# Altium PCB 24.067.PcbDoc
Units mil, origin at the board's own origin, x right, y up, seen from the top; angles counter-clockwise.
Board outline 1929.13 x 1023.62 mil, 2 copper layers (Top Layer, Bottom Layer); 19 components, 32 nets, 65 pads, 0 vias.
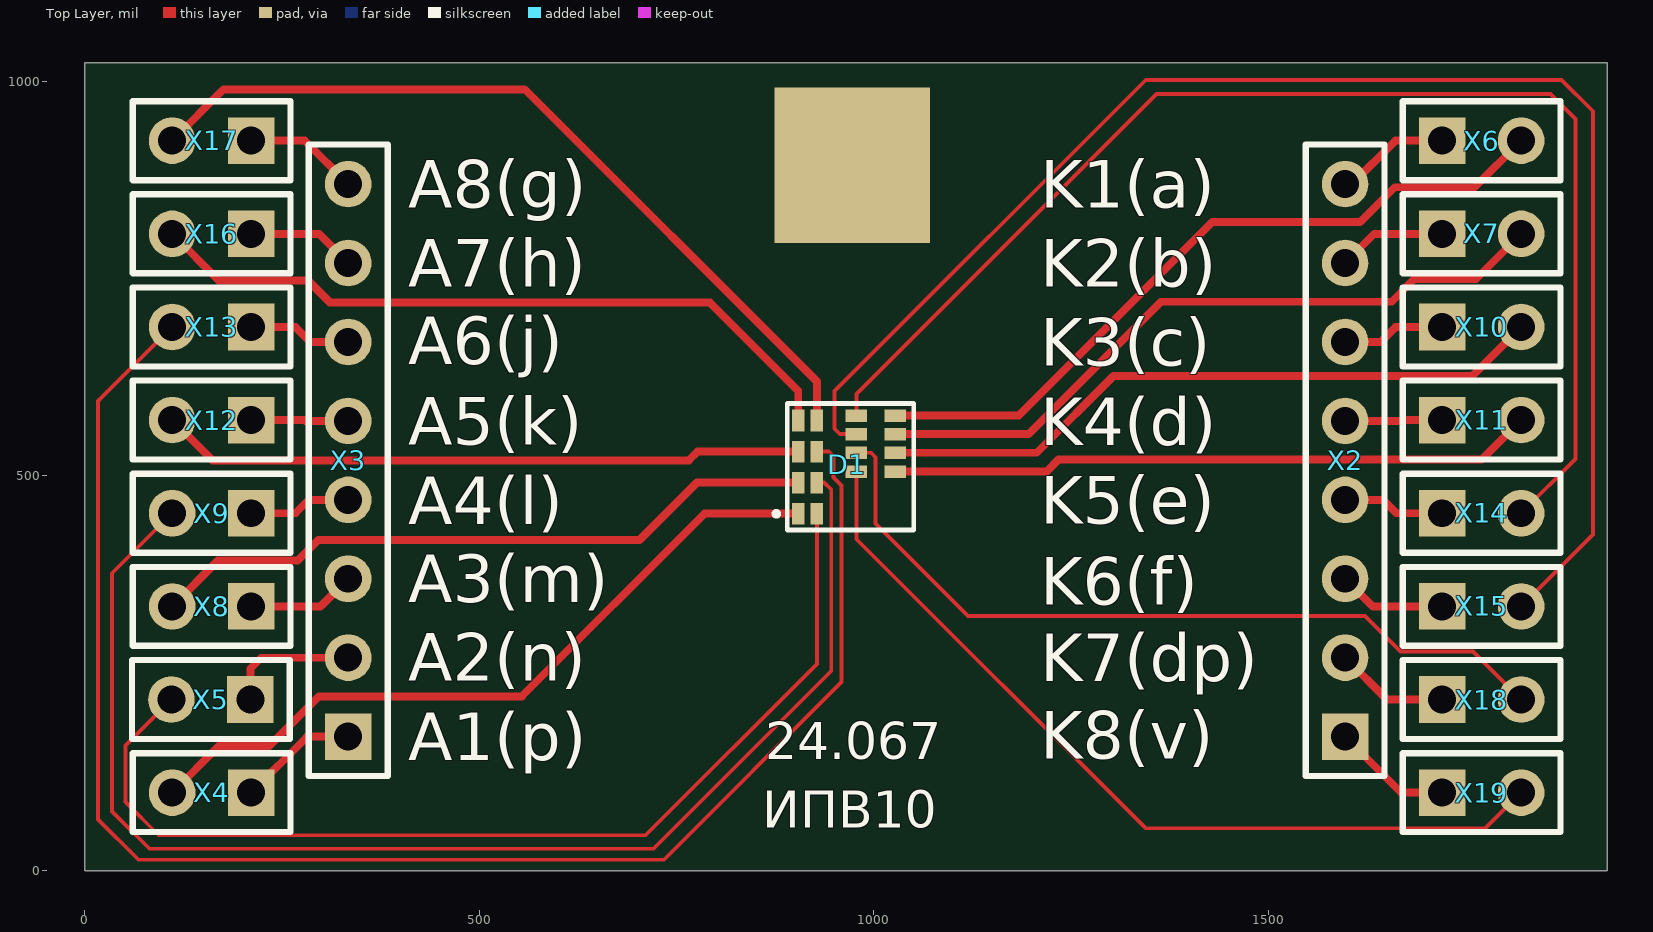
[diagram p0: Top Layer view]
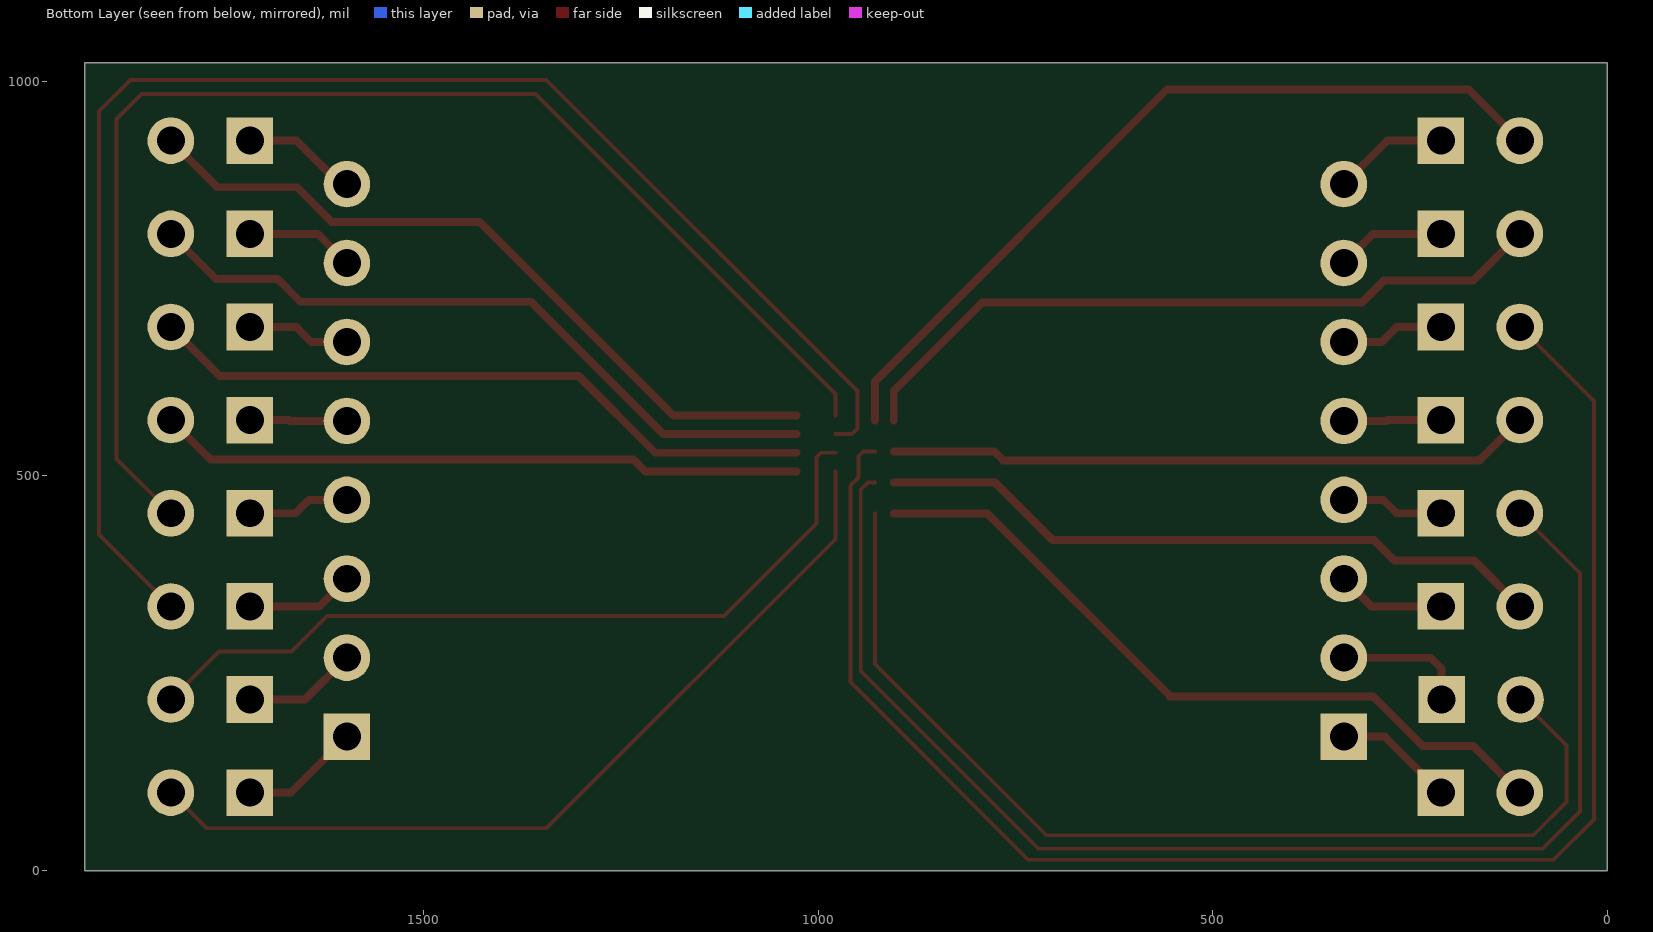
[diagram p1: Bottom Layer view, seen from below]

## Layer stack, top to bottom
Top Solder: solder mask 0.4, Solder Resist, Dk 3.5
Top Layer: signal copper 1.4
Dielectric 1: dielectric 12.6, FR-4, Dk 4.8
Bottom Layer: signal copper 1.4
Bottom Solder: solder mask 0.4, Solder Resist, Dk 3.5

## Board outline
1929.13,0 1929.13,1023.62 0,1023.62 0,0

## Design rules (kind name [scope] priority, off if disabled: settings)
Clearance [All] p1: gap=10 ignorepadtopadclearanceinfootprint=FALSE except(0: Arc-Hole Track-Hole SMDPad-Hole THPad-Hole Via-Hole Fill-Hole Poly-Hole Region-Hole Text-Hole; 7.87: Arc-Arc Arc-Track Arc-SMDPad Arc-THPad Track-Track Track-SMDPad Track-THPad SMDPad-SMDPad SMDPad-THPad THPad-THPad)
PolygonConnect [All] p1: connectstyle=Relief reliefconductorwidth=10 reliefentries=4 polygonreliefangle="90 Angle" airgapwidth=10
RoutingVias [All] p1: holewidth=28 width=50 viastyle="Through Hole" minholewidth=28 minwidth=50 maxholewidth=28 maxwidth=50
SolderMaskExpansion [All] p1: expansion=4
Width [All] p1: maxlimit=10 minlimit=4.92 preferedwidth=10
30 further rules are at their usual default settings.

## Components (designator, comment, footprint, x,y, rotation, side; value= is the part's Value field where it differs from the comment)
D1 "LED_8x8" LED_8x8 903.81,452 r0 top
X2 "Header 8" HDR1X8 1596.91,169.74 r90 top
X3 "Header 8" HDR1X8 333.91,169.74 r90 top
X4 "Header 2" HDR1X2 210.91,98.74 r180 top
X5 "Header 2" HDR1X2 209.91,216.74 r180 top
X6 "Header 2" HDR1X2 1719.91,924.74 r0 top
X7 "Header 2" HDR1X2 1719.91,806.74 r0 top
X8 "Header 2" HDR1X2 210.91,334.74 r180 top
X9 "Header 2" HDR1X2 210.91,452.74 r180 top
X10 "Header 2" HDR1X2 1719.91,688.74 r0 top
X11 "Header 2" HDR1X2 1719.91,570.74 r0 top
X12 "Header 2" HDR1X2 210.91,570.74 r180 top
X13 "Header 2" HDR1X2 210.91,688.74 r180 top
X14 "Header 2" HDR1X2 1719.91,452.74 r0 top
X15 "Header 2" HDR1X2 1719.91,334.74 r0 top
X16 "Header 2" HDR1X2 210.91,806.74 r180 top
X17 "Header 2" HDR1X2 210.91,924.74 r180 top
X18 "Header 2" HDR1X2 1719.91,216.74 r0 top
X19 "Header 2" HDR1X2 1719.91,98.74 r0 top

## Footprints (in the part's own frame and the unit in brackets; to place one, negate y for a bottom-side part, rotate by r counter-clockwise, add the part's x,y. Pads: shape width x height; smd on the part's side, far side on the other; paste and mask are expansions set on the pad)
HDR1X2 [mm] "Connector; Header; 2 Position"
  rect 1.5x1.5 hole 0.9: 1(0,0)
  round 1.5 hole 0.9: 2(2.54,0)
  silkscreen extent -1.27,-1.27 3.81,1.27
HDR1X8 [mm] "Connector; Header; 8 Position"
  rect 1.5x1.5 hole 0.9: 1(0,0)
  round 1.5 hole 0.9: 2(2.54,0) 3(5.08,0) 4(7.62,0) 5(10.16,0) 6(12.7,0) 7(15.24,0) 8(17.78,0)
  silkscreen extent -1.27,-1.27 19.05,1.27
LED_8x8 [mm] "24.067"
  rect 0.4x0.7 smd: 1(0,0) 2(0.6,0) 3(0,1) 4(0.6,1) 5(0,2) 6(0.6,2) 7(0,3) 8(0.6,3)
  rect 0.7x0.4 smd: 9(3.125,3.159) 10(3.125,2.559) 11(3.125,1.959) 12(3.125,1.359) 13(1.875,3.159) 14(1.875,2.559) 15(1.875,1.959) 16(1.875,1.359)
  silkscreen extent -0.72,-0.52 3.72,3.55

## Part data
X2 X3: "Header, 8-Pin", LatestRevisionDate=17-Jul-2002, LatestRevisionNote="Re-released for DXP Platform.", Publisher="Altium Limited"
X4 X5 X6 X7 X8 X9 X10 X11 X12 X13 X14 X15 X16 X17 X18 X19: "Header, 2-Pin", LatestRevisionDate=17-Jul-2002, LatestRevisionNote="Re-released for DXP Platform.", Publisher="Altium Limited"

## Free pads (board coordinates)
  rect 196.85x196.85 smd: 0(972.44,893.7)

## Nets (pads, with @x,y where several pads share a name; then routed paths per layer and width w, separated by ;. In a path a pad name is that pad's centre, name@x,y a point inside that pad or via, vN(x,y) a via of type N, cw(c..) or ccw(c..) an arc to the next point about the centre after c; other vN are vias at no path point)
A1: D1.1 X4.2 | length 939.6
  Top Layer w10: X4.2 169.91,157.74 233.91,157.74 296.91,220.74 553.91,220.74 785.41,452.24 D1.1@904.09,452.24
A1_0: X3.1 X4.1 | length 152.4
  Top Layer w10: X4.1 281.91,169.74 X3.1
A2: D1.2 X5.2 | length 1328.2
  Top Layer w4.92: X5.2 51.91,158.74 51.91,86.74 93.91,44.74 710.72,44.74 927.91,261.93 D1.2@927.91,452.74
A2_0: X3.2 X5.1 | length 168.8
  Top Layer w10: X5.1 209.91,255.74 223.91,269.74 X3.2
A3: D1.3 X8.2 | length 858.2
  Top Layer w10: X8.2 168.91,392.74 269.91,392.74 295.91,418.74 702.91,418.74 775.78,491.61 D1.3@904.09,491.61
A3_0: X3.3 X8.1 | length 137.5
  Top Layer w10: X8.1 298.91,334.74 X3.3
A4: D1.4 X9.2 | length 1684.8
  Top Layer w4.92: X9.2 34.91,376.74 34.91,74.85 82.02,27.74 720.91,27.74 945.92,252.75 945.92,482.73 936.91,491.74 D1.4@927.91,491.74
A4_0: X3.4 X9.1 | length 130
  Top Layer w10: X9.1 266.91,452.74 283.91,469.74 X3.4
A5: D1.5 X12.2 | length 819
  Top Layer w10: X12.2 161.91,519.74 765.44,519.74 776.68,530.98 D1.5@904.09,530.98
A5_0: X3.5 X12.1 | length 123.4
  Top Layer w10: X12.1 278.91,570.74 279.91,569.74 X3.5
A6: D1.6 X13.2 | length 2033.1
  Top Layer w4.92: X13.2 16.91,594.74 16.91,64.85 68.02,13.74 733.91,13.74 958.91,238.74 958.91,487.83 948.91,497.83 948.91,524.74 942.68,530.98 D1.6@927.72,530.98
A6_0: X3.6 X13.1 | length 130.9
  Top Layer w10: X13.1 266.91,688.74 285.91,669.74 X3.6
A7: D1.7 X16.2 | length 913
  Top Layer w10: X16.2 169.91,747.74 282.91,747.74 310.91,719.74 792.07,719.74 904.09,607.72 D1.7@904.09,570.35
A7_0: X3.7 X16.1 | length 138.3
  Top Layer w10: X16.1 296.91,806.74 X3.7
A8: D1.8 X17.2 | length 1046.3
  Top Layer w10: X17.2 175.91,989.74 557.5,989.74 927.72,619.53 D1.8@927.72,570.35
A8_0: X3.8 X17.1 | length 145.8
  Top Layer w10: X17.1 278.91,924.74 X3.8
K1: D1.9 X6.2 | length 937
  Top Layer w10: D1.9@1027.13,576.61 1183.37,576.61 1428.5,821.74 1615.91,821.74 1659.91,865.74 1760.91,865.74 X6.2
K1_0: X2.8 X6.1 | length 145.8
  Top Layer w10: X2.8 1605.59,869.74 1660.59,924.74 X6.1
K2: D1.10 X7.2 | length 897.9
  Top Layer w10: D1.10@1027.13,552.98 1195.75,552.98 1363.5,720.74 1655.91,720.74 1684.91,749.74 1762.91,749.74 X7.2
K2_0: X2.7 X7.1 | length 138.3
  Top Layer w10: X2.7 1633.91,806.74 X7.1
K3: D1.11 X10.2 | length 858.8
  Top Layer w10: D1.11@1027.13,529.36 1206.13,529.36 1303.5,626.74 1757.91,626.74 X10.2
K3_0: X2.6 X10.1 | length 130.9
  Top Layer w10: X2.6 1641.91,669.74 1660.91,688.74 X10.1
K4: D1.12 X11.2 | length 819.7
  Top Layer w10: D1.12@1027.13,505.74 1218.91,505.74 1233.91,520.74 1769.91,520.74 X11.2
K4_0: X2.5 X11.1 | length 123.4
  Top Layer w10: X2.5 1668.91,569.74 1669.91,570.74 X11.1
K5: D1.13 X14.2 | length 1636.4
  Top Layer w4.92: D1.13@977.91,576.61 977.91,603.9 1357.76,983.74 1857.02,983.74 1888.76,952 1888.76,521.59 X14.2
K5_0: X2.4 X14.1 | length 130
  Top Layer w10: X2.4 1644.91,469.74 1661.91,452.74 X14.1
K6: D1.14 X15.2 | length 1884
  Top Layer w4.92: D1.14@977.91,552.98 956.67,552.98 949.91,559.74 949.91,607.39 1344.26,1001.74 1871.02,1001.74 1910.76,962 1910.76,425.59 X15.2
K6_0: X2.3 X15.1 | length 137.5
  Top Layer w10: X2.3 1631.91,334.74 X15.1
K7: D1.15 X18.2 | length 1020.6
  Top Layer w4.92: D1.15@977.91,529.36 996.29,529.36 1002.02,523.63 1002.02,439.74 1119.02,322.74 1621.85,322.74 1666.85,277.74 1758.91,277.74 X18.2
K7_0: X2.2 X18.1 | length 145
  Top Layer w10: X2.2 1649.91,216.74 X18.1
K8: D1.16 X19.2 | length 1098.2
  Top Layer w4.92: D1.16@977.91,505.74 977.91,419.74 1343.91,53.74 1774.91,53.74 X19.2
K8_0: X2.1 X19.1 | length 152.4
  Top Layer w10: X2.1 1667.91,98.74 X19.1

## Silkscreen, mask and mechanical layers (free items; w line width, h text height)
Top Overlay:
  text "Всe К заменить на V?" at 751.97,1070.87 h60
  text "A8(g)" at 410.24,839.74 h60
  text "K1(a)" at 1210.76,839.74 h60
  text "A7(h)" at 410.24,739.74 h60
  text "K2(b)" at 1210.76,739.74 h60
  text "A6(j)" at 410.24,641.74 h60
  text "K3(c)" at 1210.76,639.74 h60
  text "A5(k)" at 410.24,539.74 h60
  text "K4(d)" at 1210.76,538.74 h60
  text "K5(e)" at 1210.76,439.74 h60
  text "A4(l)" at 410.24,438.74 h60
  text "A3(m)" at 410.24,339.74 h60
  text "K6(f)" at 1210.76,336.74 h60
  text "A2(n)" at 410.24,240.74 h60
  text "K7(dp)" at 1210.76,239.74 h60
  text "K8(v)" at 1210.76,141.74 h60
  text "A1(p)" at 410.24,139.74 h60
  text "24.067" at 862.2,125.98 h80
  text "ИПВ10" at 858.27,39.37 h80
Mechanical 1:
  the board outline again, w10